# Altium PCB 210x150.PcbDoc
Units mil, origin at the board's own origin, x right, y up, seen from the top; angles counter-clockwise.
Board outline 5905.51 x 8267.72 mil, 2 copper layers (Top Layer, Bottom Layer); 65 components, 37 nets, 201 pads, 79 vias.
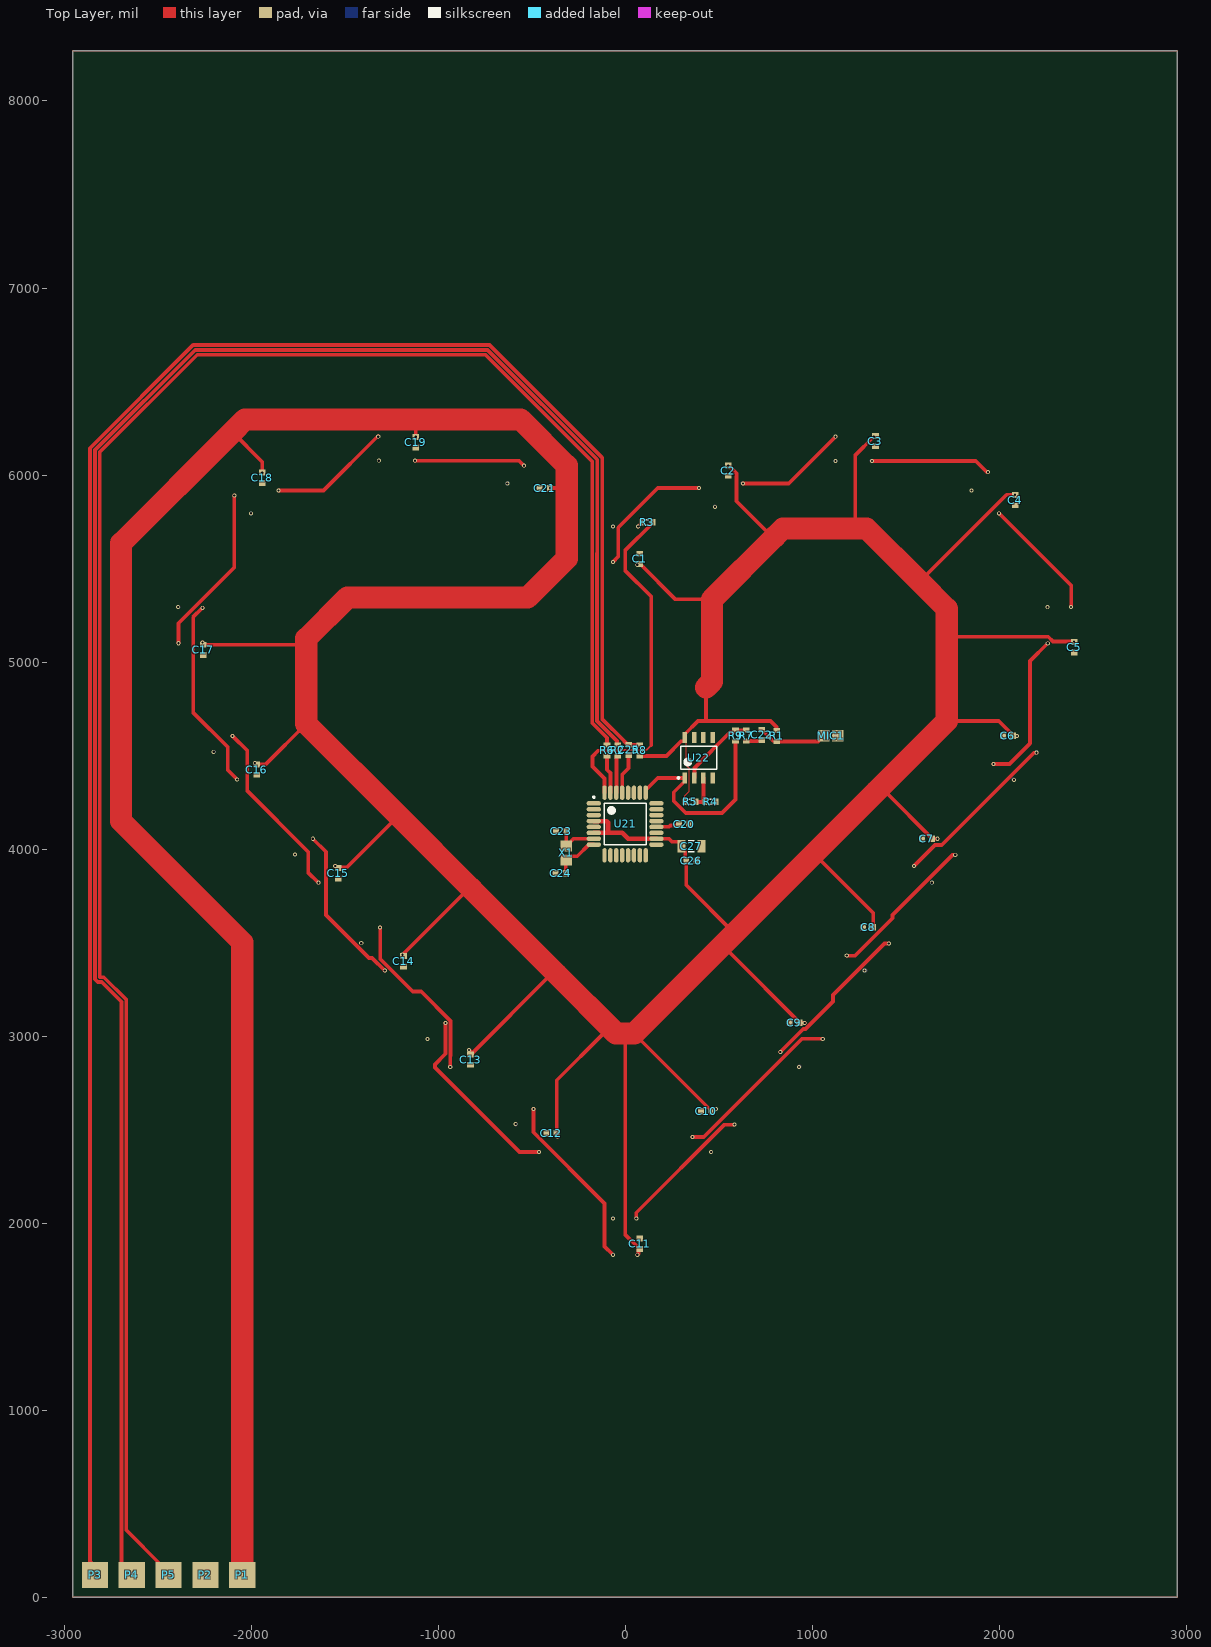
[diagram p0: Top Layer view]
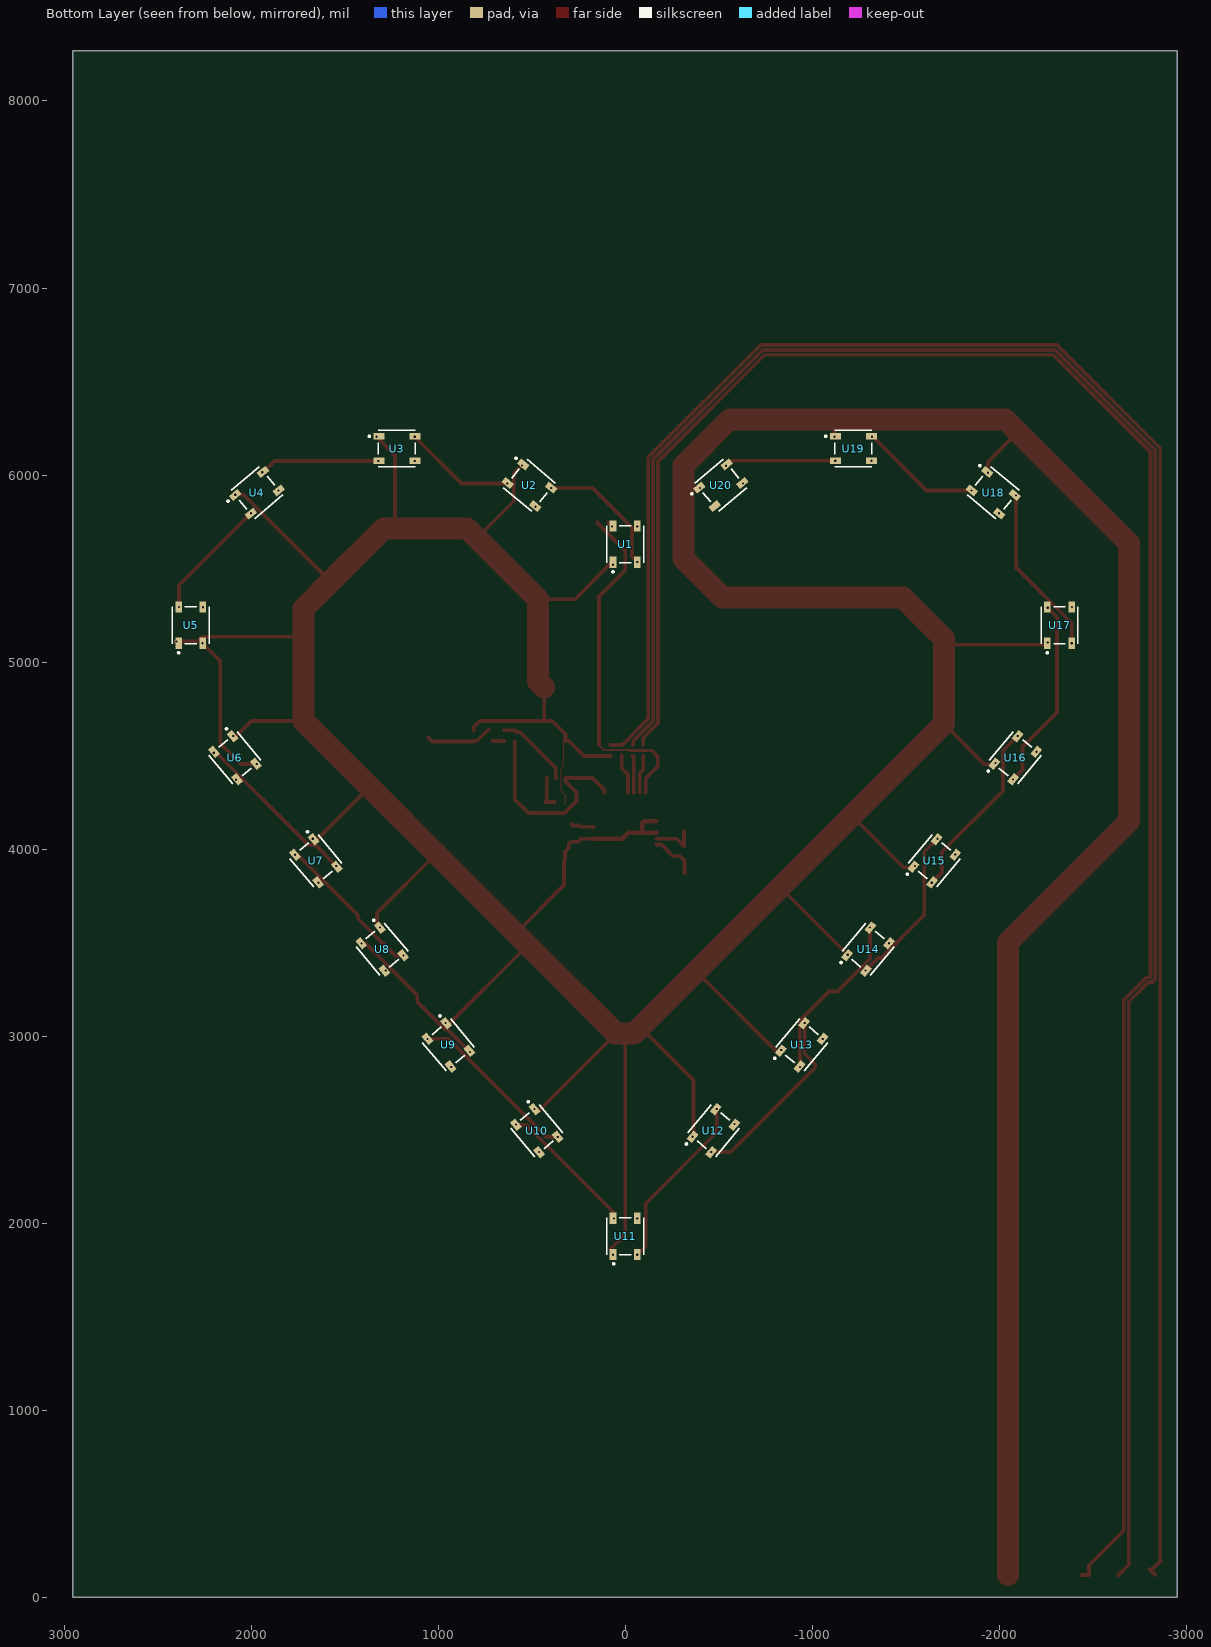
[diagram p1: Bottom Layer view, seen from below]
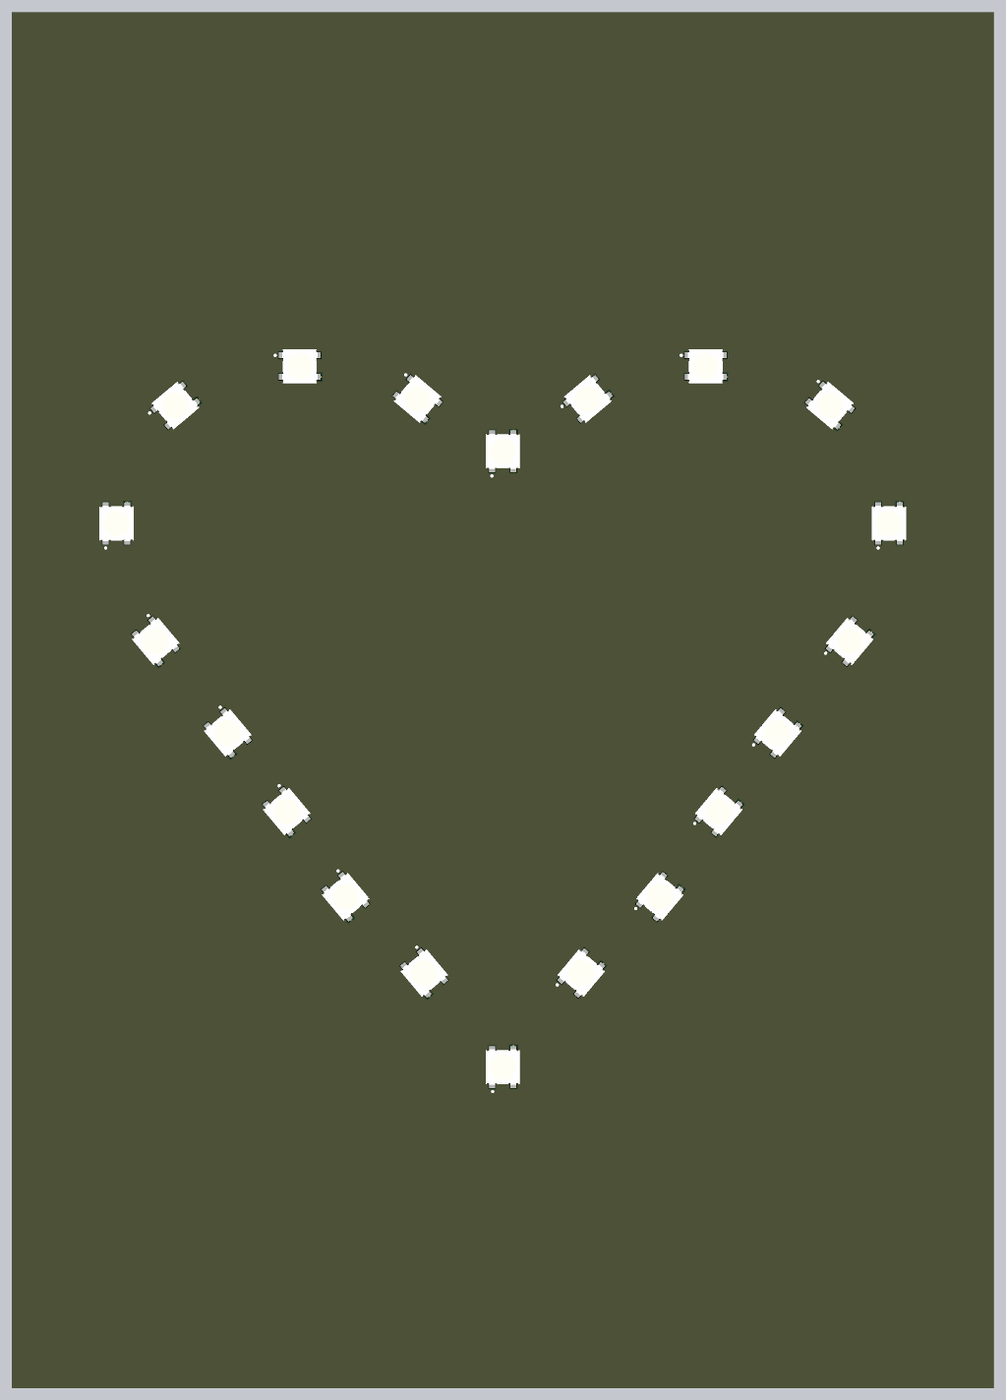
[diagram p2: 3D render of the assembled board from below, using the file's embedded part models]

## Layer stack, top to bottom
Top Solder: solder mask 0.4, Solder Resist, Dk 3.5
Top Layer: signal copper 1.4
Dielectric 1: dielectric 12.6, FR-4, Dk 4.8
Bottom Layer: signal copper 1.4
Bottom Solder: solder mask 0.4, Solder Resist, Dk 3.5

## Board outline
-2952.76,0 2952.76,0 2952.76,8267.72 -2952.76,8267.72

## Design rules (kind name [scope] priority, off if disabled: settings)
Clearance [All] p1: gap=6 ignorepadtopadclearanceinfootprint=FALSE except(0: Arc-Hole Track-Hole SMDPad-Hole THPad-Hole Via-Hole Fill-Hole Poly-Hole Region-Hole Text-Hole)
PolygonConnect [All] p1: connectstyle=Relief reliefconductorwidth=10 reliefentries=4 polygonreliefangle="90 Angle" airgapwidth=10
RoutingVias [All] p1: holewidth=11.81 width=21.65 viastyle="Through Hole" minholewidth=11.81 minwidth=21.65 maxholewidth=11.81 maxwidth=21.65
SolderMaskExpansion [All] p1: expansion=4
Width [All] p1: maxlimit=118.11 minlimit=6 preferedwidth=20 minimp=50.000000 maximp=50.000000 favimp=50.000000
30 further rules are at their usual default settings.

## Components (designator, comment, footprint, x,y, rotation, side; value= is the part's Value field where it differs from the comment)
C1 "Cap Semi" 1608[0603] 78.74,5551.18 r270 top value=100nF
C2 "Cap Semi" 1608[0603] 551.18,6023.62 r90 top value=100nF
C3 "Cap Semi" 1608[0603] 1338.58,6181.1 r90 top value=100nF
C4 "Cap Semi" 1608[0603] 2086.61,5866.14 r90 top value=100nF
C5 "Cap Semi" 1608[0603] 2401.57,5078.74 r90 top value=100nF
C6 "Cap Semi" 1608[0603] 2047.24,4606.3 r0 top value=100nF
C7 "Cap Semi" 1608[0603] 1614.17,4055.12 r0 top value=100nF
C8 "Cap Semi" 1608[0603] 1299.21,3582.68 r0 top value=100nF
C9 "Cap Semi" 1608[0603] 905.51,3070.87 r0 top value=100nF
C10 "Cap Semi" 1608[0603] 433.07,2598.43 r0 top value=100nF
C11 "Cap Semi" 1608[0603] 78.74,1889.76 r270 top value=100nF
C12 "Cap Semi" 1608[0603] -393.7,2480.32 r0 top value=100nF
C13 "Cap Semi" 1608[0603] -826.77,2874.02 r90 top value=100nF
C14 "Cap Semi" 1608[0603] -1185,3400 r90 top value=100nF
C15 "Cap Semi" 1608[0603] -1535,3870 r90 top value=100nF
C16 "Cap Semi" 1608[0603] -1970,4425 r90 top value=100nF
C17 "Cap Semi" 1608[0603] -2255,5065 r90 top value=100nF
C18 "Cap Semi" 1608[0603] -1940,5985 r90 top value=100nF
C19 "Cap Semi" 1608[0603] -1120,6175 r90 top value=100nF
C20 "Cap Semi" 1608[0603] 314.96,4133.86 r180 top value=0.1u
C21 "Cap Semi" 1608[0603] -430,5930 r0 top value=100nF
C22 "Cap Semi" 1608[0603] 730,4610 r90 top value=1uF
C23 "Cap Semi" 1608[0603] -342.52,4094.49 r0 top value=12p
C24 "Cap Semi" 1608[0603] -345,3870 r0 top value=12p
C25 "Cap Semi" 1608[0603] 20,4530 r270 top value=100n
C26 "Cap Semi" 1608[0603] 354.33,3937.01 r180 top value=1uF
C27 "Cap Semi" C1206 354.33,4015.75 r0 top value=100nF
MIC1 "MIC" MIC 1102.36,4606.3 r90 top
P1 "PAD" PAD -2047.24,118.11 r0 top
P2 "PAD" PAD -2244.09,118.11 r0 top
P3 "PAD" PAD -2834.65,118.11 r0 top
P4 "PAD" PAD -2637.8,118.11 r0 top
P5 "PAD" PAD -2440.94,118.11 r0 top
R1 "Res3" J1-0603 810,4605 r90 top value=10K
R2 "Res3" J1-0603 -39.37,4527.56 r90 top value=1K
R3 "Res3" J1-0603 118.11,5748.03 r180 top value=560
R4 "Res3" J1-0603 456.7,4251.97 r0 top value=10K
R5 "Res3" J1-0603 348.26,4251.97 r180 top value=10K
R6 "Res3" J1-0603 -96.62,4527.56 r90 top value=1K
R7 "Res3" J1-0603 647.81,4606.3 r90 top value=1K
R8 "Res3" J1-0603 78.74,4527.56 r270 top value=1K
R9 "Res3" J1-0603 590.55,4606.3 r270 top value=100k
U1 "WS2812B" ADAI-WS2812B_V 0,5629.92 r90 bottom locked
U2 "WS2812B" ADAI-WS2812B_V 511.81,5944.88 r220 bottom locked
U3 "WS2812B" ADAI-WS2812B_V 1220.47,6141.73 r180 bottom locked
U4 "WS2812B" ADAI-WS2812B_V 1968.5,5905.51 r140 bottom locked
U5 "WS2812B" ADAI-WS2812B_V 2322.83,5196.85 r90 bottom locked
U6 "WS2812B" ADAI-WS2812B_V 2086.61,4488.19 r230 bottom locked
U7 "WS2812B" ADAI-WS2812B_V 1653.54,3937.01 r230 bottom locked
U8 "WS2812B" ADAI-WS2812B_V 1299.21,3464.57 r230 bottom locked
U9 "WS2812B" ADAI-WS2812B_V 944.88,2952.76 r230 bottom locked
U10 "WS2812B" ADAI-WS2812B_V 472.44,2494.09 r230 bottom locked
U11 "WS2812B" ADAI-WS2812B_V 0,1929.13 r90 bottom locked
U12 "WS2812B" ADAI-WS2812B_V -472.44,2494.09 r130 bottom locked
U13 "WS2812B" ADAI-WS2812B_V -944.88,2952.76 r130 bottom locked
U14 "WS2812B" ADAI-WS2812B_V -1299.21,3464.57 r130 bottom locked
U15 "WS2812B" ADAI-WS2812B_V -1653.54,3937.01 r130 bottom locked
U16 "WS2812B" ADAI-WS2812B_V -2086.61,4488.19 r130 bottom locked
U17 "WS2812B" ADAI-WS2812B_V -2322.83,5196.85 r90 bottom locked
U18 "WS2812B" ADAI-WS2812B_V -1968.5,5905.51 r220 bottom locked
U19 "WS2812B" ADAI-WS2812B_V -1220.47,6141.73 r180 bottom locked
U20 "WS2812B" ADAI-WS2812B_V -511.81,5944.88 r140 bottom locked
U21 "ATmega328P-15AZ" 32MA_M 0,4133.86 r0 top
U22 "LM833DR2" ONSC-SOIC-8-751-07_V 393.7,4488.19 r90 top
X1 "KWARC" MIC -314.96,3976.38 r0 top

## Footprints (in the part's own frame and the unit in brackets; to place one, negate y for a bottom-side part, rotate by r counter-clockwise, add the part's x,y. Pads: shape width x height; smd on the part's side, far side on the other; paste and mask are expansions set on the pad)
32MA_M [mm] "Thin QFP, 32-Leads, Body 7x7mm, Pitch 0.8mm, IPC Low Density"
  oval 1.95x0.6 smd: 1(-4.25,2.8) 2(-4.25,2) 3(-4.25,1.2) 4(-4.25,0.4) 5(-4.25,-0.4) 6(-4.25,-1.2) 7(-4.25,-2) 8(-4.25,-2.8) 17(4.25,-2.8) 18(4.25,-2) 19(4.25,-1.2) 20(4.25,-0.4) 21(4.25,0.4) 22(4.25,1.2) 23(4.25,2) 24(4.25,2.8)
  oval 0.6x1.95 smd: 9(-2.8,-4.25) 10(-2,-4.25) 11(-1.2,-4.25) 12(-0.4,-4.25) 13(0.4,-4.25) 14(1.2,-4.25) 15(2,-4.25) 16(2.8,-4.25) 25(2.8,4.25) 26(2,4.25) 27(1.2,4.25) 28(0.4,4.25) 29(-0.4,4.25) 30(-1.2,4.25) 31(-2,4.25) 32(-2.8,4.25)
  silkscreen extent -4.37,-2.85 2.85,3.77, body extent -3.5,-3.5 3.5,3.5, height 1.2
1608[0603] [mm] "Chip Capacitor, Body 1.6x0.8mm, IPC High Density"
  rect 0.8x0.9 smd: 1(-0.7,0) 2(0.7,0)
  body extent -0.87,-0.48 0.87,0.48, height 1.3
ADAI-WS2812B_V [mm] "SMD, 4-Leads, Body 5x5mm, Pitch 3.3mm"
  rect 1.5x0.9 smd: 1(-2.45,1.65) 2(-2.45,-1.65) 3(2.45,-1.65) 4(2.45,1.65)
  silkscreen extent -3.87,-2.5 2.5,2.5, body extent -2.7,-2.5 2.7,2.5, height 1.69
C1206 [mm] "Chip Capacitor, Body 3.2x1.6mm, IPC High Density"
  rect 1.1x1.7 smd: 1(-1.35,0) 2(1.35,0)
  silkscreen extent -0.4,-0.75 0.4,0.75, body extent -1.7,-0.9 1.7,0.9, height 1.3
J1-0603 [mm] "Chip Resistor, Body 1.6x0.8mm, IPC High Density"
  rect 0.7x0.9 smd: 1(-0.75,0) 2(0.75,0)
  silkscreen extent -0.2,-0.35 0.2,0.35, body extent -0.85,-0.48 0.85,0.48, height 0.9
MIC [mil]
  rect 60x60 smd: 1(0,40) 2(0,-35)
ONSC-SOIC-8-751-07_V [mm] "SOIC, 8-Leads, Body 4.9x3.9mm, Pitch 1.27mm"
  rect 1.52x0.6 smd: 1(-2.74,1.905) 2(-2.74,0.635) 3(-2.74,-0.635) 4(-2.74,-1.905) 5(2.74,-1.905) 6(2.74,-0.635) 7(2.74,0.635) 8(2.74,1.905)
  silkscreen extent -2.86,-2.45 1.58,2.88, body extent -1.95,-2.45 1.95,2.45, height 1.75
PAD [mil]
  rect 140x140 smd: 1(0,0)

## Part data
C1 C2 C3 C4 C5 C6 C7 C8 C9 C10 C11 C12 C13 C14 C15 C16 C17 C18 C19 C20 C21 C22 C23 C24 C25 C26 C27: "Capacitor (Semiconductor SIM Model)", LatestRevisionDate=29-May-2009, LatestRevisionNote="IPC-7351 Footprint Added.", PackageDescription="Chip Capacitor", PackageReference=C1206, Published=8-Jun-2000, Publisher="Altium Limited"
R1 R2 R3 R4 R5 R6 R7 R8 R9: "Resistor", LatestRevisionDate=29-May-2009, LatestRevisionNote="IPC-7351 Footprint Added.", PackageDescription="Chip Resistor", PackageReference=J1-0603, Published=8-Jun-2000, Publisher="Altium Limited"
U1 U2 U3 U4 U5 U6 U7 U8 U9 U10 U11 U12 U13 U14 U15 U16 U17 U18 U19 U20: library part CMP-1740-00005-1, "Intelligent Control LED Integrated Light Source, 3.5 to 5.3 V, -25 to 80 degC, 4-Pin SMD, RoHS, Bulk", Case\Package=Radial, Current Rating="240 mA", Max Operating Temperature="125 degC", Min Operating Temperature="-55 degC", Package Quantity=200, Tolerance=10%, ComponentLink1Description="Manufacturer URL", ComponentLink1URL=https://www.adafruit.com/, ComponentLink2Description=Datasheet, ComponentLink2URL=https://cdn-shop.adafruit.com/datasheets/WS2812B.pdf, DatasheetVersion=May-13, Height="12.2 mm", Lead Pitch="5 mm", Length="12.2 mm", Mount="Through Hole", PackageDescription="4-Pin Surface Mount Device, Body 5 x 5 mm, Pitch 3.3 mm", PackageReference=WS2812B, Packaging=Bulk, Pins=2, Radiation Hardening=No, REACH SVHC="No SVHC", RoHSCompliant=true, Shielding=Unshielded
U21: library part CMP-0096-00111-2, "8-bit Automotive AVR Microcontroller, 32KB Flash, 1KB EEPROM, 2KB SRAM, 23 GPIO pins, Automotive Grade (-40°C to +125°C), 32-Pin TQFP", ComponentLink1Description="Manufacturer URL", ComponentLink1URL=http://www.atmel.com/, ComponentLink2Description="ATmega328P Datasheet", ComponentLink2URL=http://www.atmel.com/dyn/resources/prod_documents/doc7810.pdf, DatasheetVersion="revA, Nov-2009", PackageDescription="32-Lead Thin Profile Plastic Quad Flatpack (TQFP) - 7x7x1mm Body,  0.8 mm Pitch", PackageReference=32MA, PackageVersion="revB, Jul-2007", RevisionNote="URLs added"
U22: library part CMP-1310-00280-1, "Low Noise, Audio Dual Operational Amplifier, -40 to 85 degC, 8-Pin SOIC, Tape and Reel", Manufacturer="On Semiconductor", ComponentLink1Description="Manufacturer URL", ComponentLink1URL=http://www.onsemi.com/, ComponentLink2Description=Datasheet, ComponentLink2URL=http://www.onsemi.cn/pub_link/Collateral/LM833-D.PDF, ComponentLink3Description="Package Specification", ComponentLink3URL=http://www.onsemi.com/pub_link/Collateral/751-07.PDF, DatasheetVersion="Rev. 6", GBW Typ (MHz)=15, Mounting Technology="Surface Mount", PackageDescription="8-Pin Small Outline Integrated Circuit, Body 4.9 x 3.9 mm, Pitch 1.27 mm", PackageReference=SOIC-8-751-07, PackageVersion="Rev. AK, 02/2011", Packing="Tape and Reel", PartNumber=LM833DR2, RoHS=FALSE, SR Typ (V/uS)=7

## Via types
v1: diameter 21.65, hole 11.81, Top Layer to Bottom Layer, tented top, 79 vias

## Nets (pads, with @x,y where several pads share a name; then routed paths per layer and width w, separated by ;. In a path a pad name is that pad's centre, name@x,y a point inside that pad or via, vN(x,y) a via of type N, cw(c..) or ccw(c..) an arc to the next point about the centre after c; other vN are vias at no path point)
+5: C1.2 C2.2 C3.2 C4.2 C5.2 C6.2 C7.2 C8.2 C9.2 C10.2 C11.2 C12.2 C13.2 C14.2 C15.2 C16.2 C17.2 C18.2 C19.2 C21.2 C26.2 C27.1 P1.1 R1.2 R5.2 R8.2 U1.1 U2.1 U3.1 U4.1 U5.1 U6.1 U7.1 U8.1 U9.1 U10.1 U11.1 U12.1 U13.1 U14.1 U15.1 U16.1 U17.1 U18.1 U19.1 U20.1 U21.4 U21.6 U21.18 U22.8 | length 31784
  Top Layer w6: U22.8 327.51,4587.25 327.51,4446.31 342,4431.83 342,4309 318.73,4285.74 R5.2 318.73,4248.03 R5.2@329.51,4237.25
  Top Layer w20: v1(-2260,5105) -2260,5097.56 C17.2 -1737.44,5092.56 -1705,5125 ; -2100,6230 -1940,6070 v1(-1940,6012.56) ; v1(-1980,4460) -1972.56,4452.56 C16.2 -1969.84,4452.72 -1922.28,4452.72 -1705,4670 ; v1(-1550,3910) -1537.56,3897.56 C15.2 -1529.84,3902.72 -1487.28,3902.72 -1212.5,4177.5 ; C14.2 -1185,3430 v1(-1190,3435) -837.5,3787.5 -822.5,3787.5 ; -1125,6297.94 -1120,6292.94 v1(-1120,6205) C19.2 ; v1(-835,2925) -826.77,2916.77 C13.2 -824.8,2901.57 -396.38,3330 -365,3330 ; C21.2 v1(-400,5930) -322.06,5930 -312.06,5940 ; v1(-360.68,2461.96) -360.99,2462.28 -360.99,2475.17 C12.2 -366.14,2763.86 -116.08,3013.92 -48.92,3013.92 0,2965 0,1938.98 C11.2@76.77,1862.2 ; 48.92,3013.92 48.92,3012.1 460.63,2600.39 C10.2 473.43,2598.43 v1(485,2610) ; v1(65,1830) 71.02,1836.02 71.02,1856.46 C11.2@76.77,1862.2 ; v1(65,5520) 65.32,5520.32 75.43,5520.32 C1.2 80.71,5523.62 269.33,5335 465,5335 ; C11.2 C11.2@76.77,1862.2 ; R8.2 220.67,4498.03 298.78,4576.14 316.89,4576.14 318.7,4577.95 U22.8 318.7,4614.17 389.57,4685.04 433.07,4685.04 ; U21.18 168.02,4054.43 235.57,4054.43 250.78,4039.21 289.53,4039.21 301.18,4027.56 C27.1 301.18,4003.94 321.02,3984.09 321.02,3942.76 C26.2 326.77,3807.09 582.5,3551.36 582.5,3547.5 ; 433.07,4863.07 433.07,4685.04 ; 480,3445 560.91,3445 933.07,3072.83 C9.2 959.13,3070.87 v1(960,3070) ; v1(551.18,6051.18) 553.15,6051.18 595,6009.33 595,5860 785,5670 800,5670 ; R1.2 810,4652 776.96,4685.04 433.07,4685.04 ; 1010,3975 1326.77,3658.23 C8.2 1312.68,3582.68 v1(1310,3580) ; 1230,5715 1230,6105 v1(1330,6205) 1334.92,6205 C3.2 ; 1342.5,4307.5 1391.32,4307.5 1641.73,4057.09 C7.2 1669.88,4055.12 v1(1670,4055) ; 1575,5430 2040,5895 v1(2085,5895) ; 1720,4685 1998.07,4685 2074.8,4608.27 C6.2 2093.7,4606.3 v1(2095,4605) ; 1720,5135 2262.94,5135 2287.94,5110 v1(2400,5110) 2401.57,5108.43 C5.2
  Top Layer w25: U21.6 -91.54,4086.61 ; U21.4@-166.63,4148.92 -98.92,4148.92 -91.54,4141.54 -91.54,4086.61 ; U21.18 15.75,4055.12 -15.75,4086.61 -91.54,4086.61
  Top Layer w118.11: P1.1 -2047.24,3501.19 -2695,4148.94 -2695,5635 -2100,6230 -2032.06,6297.94 -1125,6297.94 -560,6297.94 -312.06,6050 -312.06,5940 -312.06,5554.19 -521.24,5345 -1485,5345 -1705,5125 -1705,4670 -1212.5,4177.5 -822.5,3787.5 -365,3330 -48.92,3013.92 48.92,3013.92 480,3445 582.5,3547.5 1010,3975 1342.5,4307.5 1720,4685 1720,5135 1720,5285 1575,5430 1290,5715 1230,5715 845,5715 800,5670 465,5335 465,4895 433.07,4863.07
  Bottom Layer w20: v1(-1940,6012.56) -1936.37,6016.19 U18.1 ; U4.1 2084.15,5894.15 v1(2085,5895)
ADC: R9.2 U21.25 U22.1 | length 1096.6
  Top Layer w20: U21.25 110.24,4315.55 175,4380.32 U22.1 318.7,4362.2 260,4303.5 260,4256.58 324.33,4192.25 517.4,4192.25 590.55,4265.4 R9.2
GND: C1.1 C2.1 C3.1 C4.1 C5.1 C6.1 C7.1 C8.1 C9.1 C10.1 C11.1 C12.1 C13.1 C14.1 C15.1 C16.1 C17.1 C18.1 C19.1 C20.1 C21.1 C23.1 C24.1 C26.1 C27.2 MIC1.2 P2.1 R4.2 U1.3 U2.3 U3.3 U4.3 U5.3 U6.3 U7.3 U8.3 U9.3 U10.3 U11.3 U12.3 U13.3 U14.3 U15.3 U16.3 U17.3 U18.3 U19.3 U20.3 U21.3 U21.5 U21.21 U22.4 | length 43.3
  Bottom Layer w20: v1(-2390,5295) -2388.31,5293.31 U17.3 ; v1(-2200,4520) -2199.68,4520.32 U16.3 ; U18.3 -2000.64,5794.36 v1(-2000,5795) ; U15.3 -1765.31,3969.69 v1(-1765,3970) ; v1(-630,5955) -627.88,5957.12 U20.3 ; v1(-585,2530) -584.2,2529.2 U12.3 ; v1(-65,2025) v1(-65,2025) U11.3 ; v1(-65,5725) v1(-65,5725) U1.3 ; v1(460,2380) 460.2,2379.8 U10.3 ; U2.3 479.68,5830.32 v1(480,5830) ; v1(930,2835) 932.11,2837.11 U9.3 ; U3.3 1124.02,6075.98 v1(1125,6075) ; v1(1280,3350) 1285.89,3350 U8.3 ; v1(1640,3820) U7.3 U7.3 ; U6.3 2077.46,4372.54 v1(2080,4370)
  other v1: -1056.65,2984.89 -1410.98,3496.7 2257.87,5293.31 1852.86,5917.75 -1316.93,6076.77
LED_DATA: R3.2 U1.4 | length 30.7
  Top Layer w20: v1(70,5725) 88.58,5743.58 R3.2
NetC20_2: C20.2 U21.20 | length 127.8
  Top Layer w20: U21.20 168.02,4118.8 235.57,4118.8 242.91,4126.14 281.65,4126.14 287.4,4131.89 C20.2
NetC22_1: C22.1 R7.1 | length 61.7
  Top Layer w20: R7.1 648.79,4577.76 707.68,4577.76 708.66,4578.74
NetC22_2: C22.2 MIC1.1 R1.1 | length 356.7
  Top Layer w20: C22.2 731.97,4637.56 790.28,4579.25 806.22,4579.25 R1.1 1031.54,4575.47 MIC1.1@1052.36,4596.3
NetC23_2: C23.2 U21.7 X1.1 | length 241.8
  Top Layer w20: C23.2 X1.1 -276.22,4055.12 U21.7
NetC24_2: C24.2 U21.8 X1.2 | length 254.1
  Top Layer w20: C24.2 -317.44,3938.9 X1.2 -294.96,3961.38 -256.14,3961.38 -193.9,4023.62 U21.8
NetC25_2: C25.2 U21.29 | length 212.7
  Top Layer w20: U21.29 -15.75,4398.54 17.88,4432.17 C25.2@17.88,4500
NetR2_1: R2.1 U21.30 | length 202.1
  Top Layer w20: U21.30 -46.55,4301.87 -46.55,4494.25 -42.77,4498.03 R2.1
NetR3_1: R3.1 U21.32 | length 1872.7
  Top Layer w11: -25,4527.56 -22.25,4530.31 115.31,4530.31 140,4555
  Top Layer w15: -145,4525 -142.44,4527.56 -25,4527.56
  Top Layer w20: -145,4525 -175,4495 -175,4441.75 -110.24,4376.99 U21.32 ; 140,4555 140,5350 0,5490 0,5596.46 147.64,5744.09 R3.1
NetR4_1: R4.1 R5.1 U22.3 | length 181.2
  Top Layer w20: R5.1 R4.1 427.17,4255.91 418.7,4264.37 U22.3
NetR6_1: R6.1 U21.31 | length 204.3
  Top Layer w20: R6.1 -96.62,4424.29 -78.74,4406.41 U21.31
NetR7_2: R7.2 R9.1 U22.2 | length 415
  Top Layer w20: U22.2 370.51,4382.13 370.51,4433.51 561,4624 578.72,4624 R9.1 R7.2
NetU1_2: U1.2 U2.4 | length 716
  Top Layer w20: v1(-65,5535) -65,5535.45 -36.4,5564.05 -36.4,5718.6 175,5930 v1(395,5930)
  Bottom Layer w20: v1(-65,5535) -64.96,5534.96 U1.2
NetU2_2: U2.2 U3.4 | length 602
  Top Layer w20: v1(630,5955) 875,5955 v1(1125,6205)
  Bottom Layer w20: U2.2 627.88,5957.12 v1(630,5955)
NetU3_2: U3.2 U4.4 | length 648.7
  Top Layer w20: v1(1320,6075) 1875,6075 1935,6015 v1(1940,6015)
  Bottom Layer w20: U3.2 1318.7,6075 v1(1320,6075)
NetU4_2: U4.2 U5.4 | length 661
  Top Layer w20: v1(2000,5795) 2385,5410 v1(2385,5295)
  Bottom Layer w20: v1(2000,5795) 2000,5794.39 U4.2
NetU5_2: U5.2 U6.4 | length 817.2
  Top Layer w20: v1(1970,4455) 2055,4455 2165,4565 2165,5005 v1(2260,5100)
  Bottom Layer w20: U5.2 2259.61,5100.39 v1(2260,5100)
NetU6_2: U6.2 U7.4 | length 911.6
  Top Layer w20: v1(1545,3910) 1656.4,4021.4 1693.46,4021.4 2186.74,4514.68 2199.68,4514.68 v1(2200,4515)
  Bottom Layer w20: U6.2 2200,4518.7 v1(2200,4515)
NetU7_2: U7.2 U8.4 | length 814.2
  Top Layer w20: v1(1185,3430) 1230.19,3430 1429.7,3629.51 1429.7,3647.63 1750.89,3968.83 1764.99,3968.83 v1(1765.31,3969.14)
NetU8_2: U8.2 U9.4 | length 843.4
  Top Layer w20: v1(830,2915) 952.15,3037.15 965.09,3037.15 1112.17,3184.23 1112.17,3220.11 1386.74,3494.68 1409.68,3494.68 v1(1410,3495)
  Bottom Layer w20: v1(1410,3495) 1410.98,3495.98 U8.2
NetU9_2: U9.2 U10.4 | length 914.1
  Top Layer w20: v1(360,2460) 420,2460 944.89,2984.89 v1(1056.65,2984.89)
NetU10_2: U10.2 U11.4 | length 749.4
  Top Layer w20: v1(60,2025) 60,2055 531.23,2526.23 v1(584.2,2526.23)
NetU11_2: U11.2 U12.4 | length 958.7
  Top Layer w20: v1(-490,2610) -490,2485 -110,2105 -110,1875 v1(-65,1830)
  Bottom Layer w20: v1(-65,1830) -65,1832.64 U11.2
NetU12_2: U12.2 U13.4 | length 1007.2
  Top Layer w20: v1(-960,3070) -960,2905 -1016.72,2848.28 -1016.72,2831.72 -565,2380 v1(-460,2380)
  Bottom Layer w20: U12.2 -460.2,2379.8 v1(-460,2380)
NetU13_2: U13.2 U14.4 | length 931.4
  Top Layer w20: v1(-1310,3580) -1310,3412.94 -1135.12,3238.06 -1090.12,3238.06 -933.17,3081.11 -933.17,2895.06 -935,2893.23 v1(-935,2835)
  Bottom Layer w20: v1(-935,2835) -932.89,2837.11 U13.2
NetU14_2: U14.2 U15.4 | length 877
  Top Layer w20: v1(-1670,4055) -1600,3985 -1600,3647.79 -1370.17,3417.95 -1352.95,3417.95 v1(-1285,3350)
  Bottom Layer w20: U14.2 -1285.9,3350 v1(-1285,3350)
NetU15_2: U15.2 U16.4 | length 977.4
  Top Layer w20: v1(-2100,4605) -2020,4525 -2020,4310 -1695,3985 -1695,3875 v1(-1640,3820)
  Bottom Layer w20: U15.2 U15.2 v1(-1640,3820)
NetU16_2: U16.2 U17.4 | length 1035.8
  Top Layer w20: v1(-2260,5290) -2310,5240 -2310,4730 -2125,4545 -2125,4423.17 v1(-2074.38,4372.54)
NetU17_2: U17.2 U18.4 | length 913
  Top Layer w20: v1(-2387.8,5100.39) -2387.8,5207.2 -2090,5505 v1(-2090,5890)
NetU18_2: U18.2 U19.4 | length 658.9
  Top Layer w20: v1(-1852.86,5917.75) -1612.25,5917.75 -1320,6210 v1(-1320,6205)
NetU19_2: U19.2 U20.4 | length 595.1
  Top Layer w20: v1(-1124.02,6076.77) -566.77,6076.77 v1(-540,6050)
RESET: C25.1 P3.1 R8.1 | length 10944.7
  Top Layer w20: P3.1 -2811.38,141.38 -2805,147.76 -2817.76,147.76 -2862.5,192.5 -2862,193 -2862,6143 -2310,6695 -725,6695 -123,6093 -123,4694.84 -3.97,4575.81 -3.97,4575.01 15.92,4555.12 17.88,4555.12 18.87,4556.1 77.76,4556.1 R8.1
RX: P4.1 R2.2 | length 10828.7
  Top Layer w20: P4.1 -2693,173.31 -2693,254.66 -2693,3183.59 -2798.23,3288.82 -2819.77,3288.82 -2835,3304.05 -2835,3325.59 -2835,6133.23 -2299.23,6669 -735.77,6669 -149,6082.23 -149,5585 ; -150,5580 -150,4685.07 -43.31,4578.38 -43.31,4557.09 R2.2
TX: P5.1 R6.2 | length 10825.5
  Top Layer w20: P5.1 -2480,118.11 -2480,170 -2667,357 -2667,3172.82 -2667,3194.36 -2787.46,3314.82 -2809,3314.82 -2809,6122.46 -2288.46,6643 -746.54,6643 -176,6072.46 -176,4674.3 -96.62,4594.93 R6.2
pads on no net: U20.2 U21.1 U21.2 U21.9 U21.10 U21.11 U21.12 U21.13 U21.14 U21.15 U21.16 U21.17 U21.19 U21.22 U21.23 U21.24 U21.26 U21.27 U21.28 U22.5 U22.6 U22.7

## Polygon pours and split planes (outlines as drawn)
GND on Bottom Layer "NONET_L02_P000" (solid, shelved, pour order 0): -2952.76,8267.72 2952.76,8267.72 2952.76,0 -2952.76,0
GND on Top Layer "NONET_L01_P002" (solid, shelved, pour order 2): -2952.76,8267.72 2952.76,8267.72 2952.76,0 -2952.76,0

## Other copper
Top Layer:
  text "'.Layer_Name'" at -1550,8600 h400
Bottom Layer:
  text "'.Layer_Name'" at -1550,8600 h400

## Silkscreen, mask and mechanical layers (free items; w line width, h text height)
Top Overlay:
  text "'.Layer_Name'" at -1550,8600 h400
Bottom Overlay:
  text "'.Layer_Name'" at -1550,8600 h400
Top Solder:
  text "'.Layer_Name'" at -1550,8600 h400
Bottom Solder:
  text "'.Layer_Name'" at -1550,8600 h400
PCB Outline:
  lines w7.87: -2952.76,0 -2952.76,8267.72 2952.76,8267.72 2952.76,0 -2952.76,0
  lines w10: -2952.76,0 2952.76,0 2952.76,8267.72 -2952.76,8267.72 -2952.76,0
  text "'.Layer_Name'" at -1550,8600 h400
PCB Dimensions:
  the board outline again, w7.87
  text "'.Layer_Name'" at -1550,8600 h400

## Dimensions
-2952.76,8267.72 to -2952.76,0 on PCB Dimensions
2952.76,0 to -2952.76,0 on PCB Dimensions